# EAGLE board chaser_man (EAGLE 6.4)
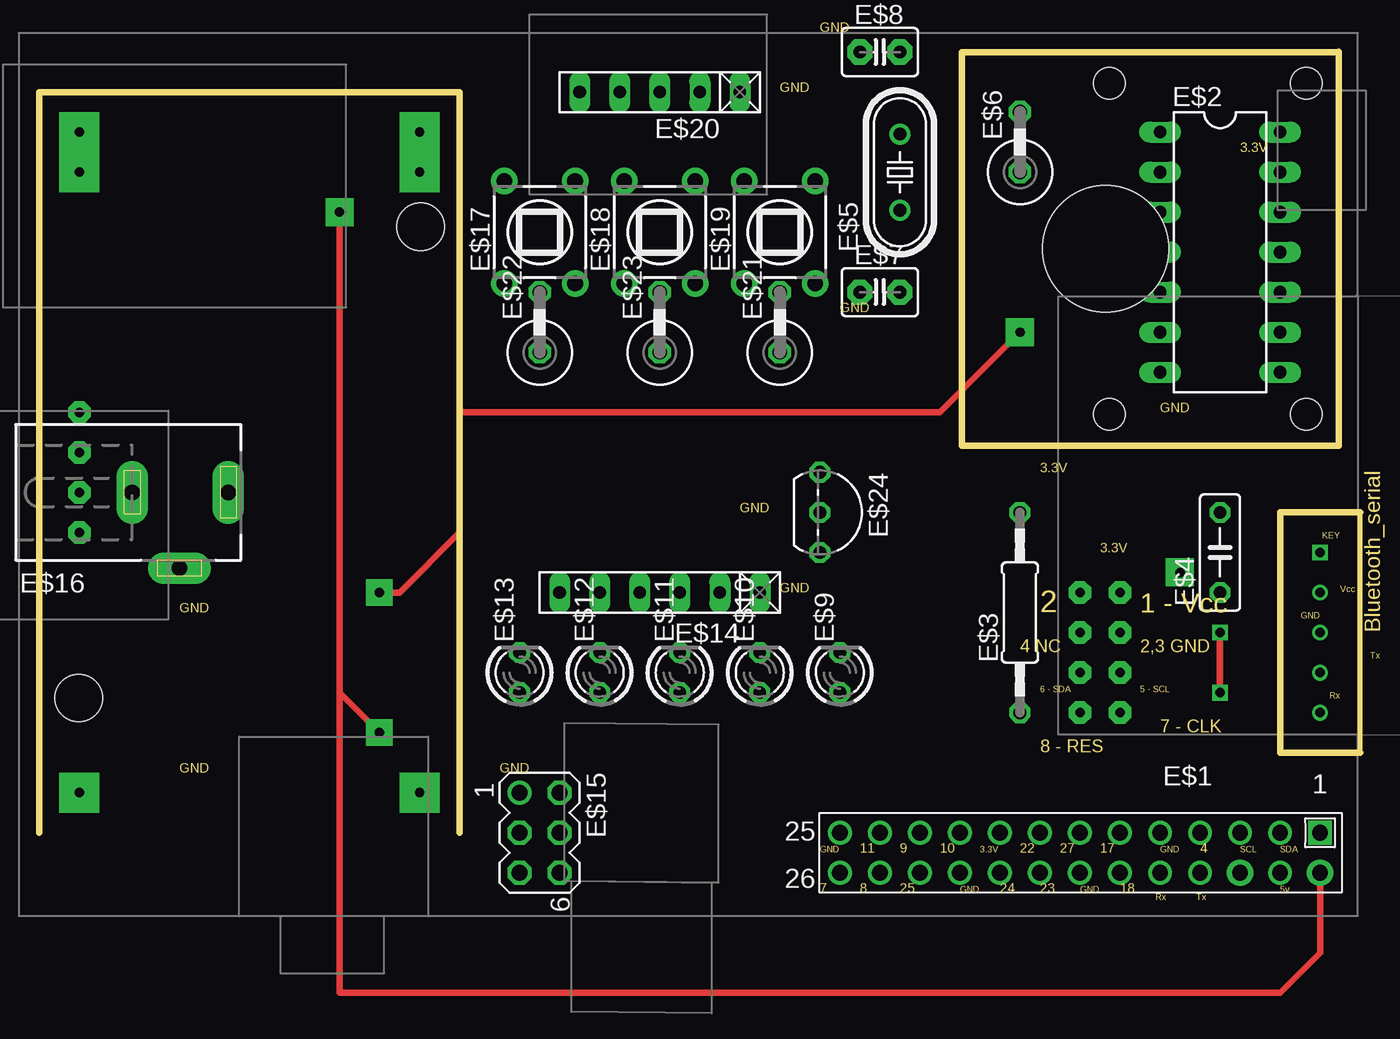
[diagram p0: board, top side]

Size 83.82 x 49.55 mm. Coordinates in mm from the lower left corner, seen from the top.
Outline: 82.46,49.5 58.56,49.5 58.56,24.55 82.46,24.55 82.46,49.55
Outline: 26.67,0 26.67,46.99 0,46.99 0,0
Outline: 83.82,5.08 83.82,20.32 78.74,20.32 78.74,5.08 83.82,5.08
Copper layers (1*16): Top 0.035mm / dielectric 1.5mm / Bottom 0.035mm
Design rules "default": minimum track width 10mil, minimum drill 24mil, track to track 8mil, track to pad 8mil, pad to pad 8mil, via to via 8mil, smd to smd 8mil, copper to edge 40mil, drill to drill 8mil, minimum pad ring 10mil, minimum via ring 8mil, stop-mask expansion 4mil, vias tented up to drill 0mil, thermal gap 10mil
Holes 2 mm at 67.91,47.55 67.91,26.55 80.41,47.55 80.41,26.55
Holes 8 mm at 67.66,37.05
Holes 3 mm at 2.49,8.55 24.19,38.45

## Footprints (pad centres in the part's own frame; a part is rotated, then mirrored left to right if it is on the bottom)
RASPBERRY-PI_REV1 = drill 1 square: 1 -41.91,21.59 | drill 1 pad 1.676: 2 -41.91,24.13; 6 -36.83,24.13 | drill 1: 3 -39.37,21.59; 4 -39.37,24.13; 5 -36.83,21.59; 7 -34.29,21.59; 8 -34.29,24.13; 9 -31.75,21.59; 10 -31.75,24.13; 11 -29.21,21.59; 12 -29.21,24.13; 13 -26.67,21.59; 14 -26.67,24.13; 15 -24.13,21.59; 16 -24.13,24.13; 17 -21.59,21.59; 18 -21.59,24.13; 19 -19.05,21.59; 20 -19.05,24.13; 21 -16.51,21.59; 22 -16.51,24.13; 23 -13.97,21.59; 24 -13.97,24.13; 25 -11.43,21.59; 26 -11.43,24.13
DIL14 = drill 0.813 long: 1 -7.62,-3.81; 2 -5.08,-3.81; 3 -2.54,-3.81; 4 0,-3.81; 5 2.54,-3.81; 6 5.08,-3.81; 7 7.62,-3.81; 8 7.62,3.81; 9 5.08,3.81; 10 2.54,3.81; 11 0,3.81; 12 -2.54,3.81; 13 -5.08,3.81; 14 -7.62,3.81
0207/12 = drill 0.813 octagon: 1 -6.35,0; 2 6.35,0
C050-025X075 = drill 0.813 octagon: 1 -2.54,0; 2 2.54,0
HC49/S = drill 0.813: 1 -2.413,0; 2 2.413,0
0411V = drill 0.914 octagon: 1 -2.54,0; 2 1.27,0
C2.5-3 = drill 0.813 pad 1.6 octagon: 1 -1.27,0; 2 1.27,0
LED3MM = drill 0.813 octagon: A -1.27,0; K 1.27,0
RN-6 = drill 0.813 long: 1 -6.35,0; 2 -3.81,0; 3 -1.27,0; 4 1.27,0; 5 3.81,0; 6 6.35,0
MA03-2 = drill 1.016: 1 -2.54,-1.27 | drill 1.016 octagon: 2 -2.54,1.27; 3 0,-1.27; 4 0,1.27; 5 2.54,-1.27; 6 2.54,1.27
DCJ0303 = drill 1 pad 2 long: 1 0,3.1; 2 4.8,0; 3 0,-3
TL1105SP = drill 1 pad 1.676: 1 -2.25,3.25; 2 2.25,3.25; 3 -2.25,-3.25; 4 2.25,-3.25
RN-5 = drill 0.813 long: 1 -5.08,0; 2 -2.54,0; 3 0,0; 4 2.54,0; 5 5.08,0
TO92- = drill 0.813 octagon: 1 -2.54,0; 2 0,0; 3 2.54,0

## Placement (x,y rotation side)
E$1  [RASPBERRY-PI_REV1]  39.37,21.59 180 top
E$2  [DIL14]  74.93,36.83 270 top
E$3  [0207/12]  62.23,13.97 90 top
E$4  [C050-025X075]  74.93,17.78 90 top
E$5  [HC49/S]  54.61,41.91 90 top
E$6  [0411V]  62.23,44.45 90 top
E$7  [C2.5-3]  53.34,34.29 0 top
E$8  [C2.5-3]  53.34,49.53 0 top
E$9  [LED3MM]  50.8,10.16 90 top
E$10  [LED3MM]  45.72,10.16 90 top
E$11  [LED3MM]  40.64,10.16 90 top
E$12  [LED3MM]  35.56,10.16 90 top
E$13  [LED3MM]  30.48,10.16 90 top
E$14  [RN-6]  39.37,15.24 180 top
E$15  [MA03-2]  31.75,0 270 top
E$16  [DCJ0303]  8.89,21.59 270 top
E$17  [TL1105SP]  31.75,38.1 0 top
E$18  [TL1105SP]  39.37,38.1 0 top
E$19  [TL1105SP]  46.99,38.1 0 top
E$20  [RN-5]  39.37,46.99 180 top
E$21  [0411V]  46.99,33.02 90 top
E$22  [0411V]  31.75,33.02 90 top
E$23  [0411V]  39.37,33.02 90 top
E$24  [TO92-]  49.53,20.32 270 top

## Library data of the parts
E$1 = RaspberryPi
E$2 = 74ac-logic
E$3 E$21-E$23 = resistor
E$4 E$6 = rcl
E$5 = crystal
E$7 E$8 = capacitor-wima
E$9-E$13 = led
E$14 E$20 = resistor-net
E$15 = con-lstb
E$16 = con-jack
E$17-E$19 = switch
E$24 = maxim

## Nets
S$11: E$1.2

## Tracks (layer width: path | path; a pad name or v marks a point on that pad's centre or on a via)
S$1  (via drill 0.6)
  other vias: 81.28,17.78
S$2  (via drill 0.6)
  other vias: 81.28,15.24
S$3  (via drill 0.6)
  other vias: 81.28,12.7
S$4  (via drill 0.6)
  other vias: 81.28,10.16
S$5  (via drill 0.6)
  other vias: 81.28,7.62
S$6  (via drill 0.6)
  Top 0.406: v74.93,8.89 v74.93,12.7
S$7  (via drill 0.6 pad 2.54)
  other vias: 2.54,2.54
S$8  (via drill 0.6 pad 2.54)
  other vias: 24.13,2.54
S$9  (via drill 0.6 pad 2.54)
  other vias: 24.13,44.45
S$10  (via drill 0.6 pad 2.54)
  other vias: 2.54,44.45
S$11  (via drill 0.6 pad 1.68, 0.6 pad 1.78)
  Top 0.406: v19.05,39.37 19.05,8.89 | 19.05,8.89 19.05,-10.16 78.74,-10.16 81.28,-7.62 E$1.2 | 19.05,8.89 v21.59,6.35
S$12  (via drill 0.6 pad 1.78)
  other vias: 72.39,16.51
S$14  (via drill 0.6 pad 2.54)
  other vias: 24.13,41.91
S$15  (via drill 0.6 pad 2.54)
  other vias: 2.54,41.91
S$16  (via drill 0.6 pad 1.68, 0.6 pad 1.78)
  Top 0.406: v21.59,15.24 22.86,15.24 26.67,19.05 26.67,26.67 57.15,26.67 v62.23,31.75
S$17  (via drill 0.6 pad 1.42)
  other vias: 68.58,15.24
S$18  (via drill 0.6 pad 1.42)
  other vias: 68.58,12.7
S$19  (via drill 0.6 pad 1.42)
  other vias: 68.58,10.16
S$20  (via drill 0.6 pad 1.42)
  other vias: 68.58,7.62
S$21  (via drill 0.6 pad 1.42)
  other vias: 66.04,7.62
S$22  (via drill 0.6 pad 1.42)
  other vias: 66.04,10.16
S$23  (via drill 0.6 pad 1.42)
  other vias: 66.04,12.7
S$24  (via drill 0.6 pad 1.42)
  other vias: 66.04,15.24
S$25  (via drill 0.6 pad 1.42)
  other vias: 2.54,21.59
S$26  (via drill 0.6 pad 1.42)
  other vias: 2.54,24.13
S$27  (via drill 0.6 pad 1.42)
  other vias: 2.54,26.67
S$28  (via drill 0.6 pad 1.42)
  other vias: 2.54,19.05

## Text on the board
Pads: Vout + (5V) | Vout - | Vin - | Vin +
Dimension: GND | GND | 3.3V | GND | GND | 3.3V | GND | KEY | 3.3V | GND | Vcc | GND | 2 | 1 - Vcc | GND | Bluetooth_serial | 4 NC | 2,3 GND | Tx | 6 - SDA | 5 - SCL | Rx | 7 - CLK | 8 - RES | GND | GND | GND | 11 | 9 | 10 | 3.3V | 22 | 27 | 17 | GND | 4 | SCL | SDA | 7 | 8 | 25 | GND | 24 | 23 | GND | 18 | 5v | Rx | Tx